# Allegro board ENCODER_ZPULSE_DIRECTION.brd
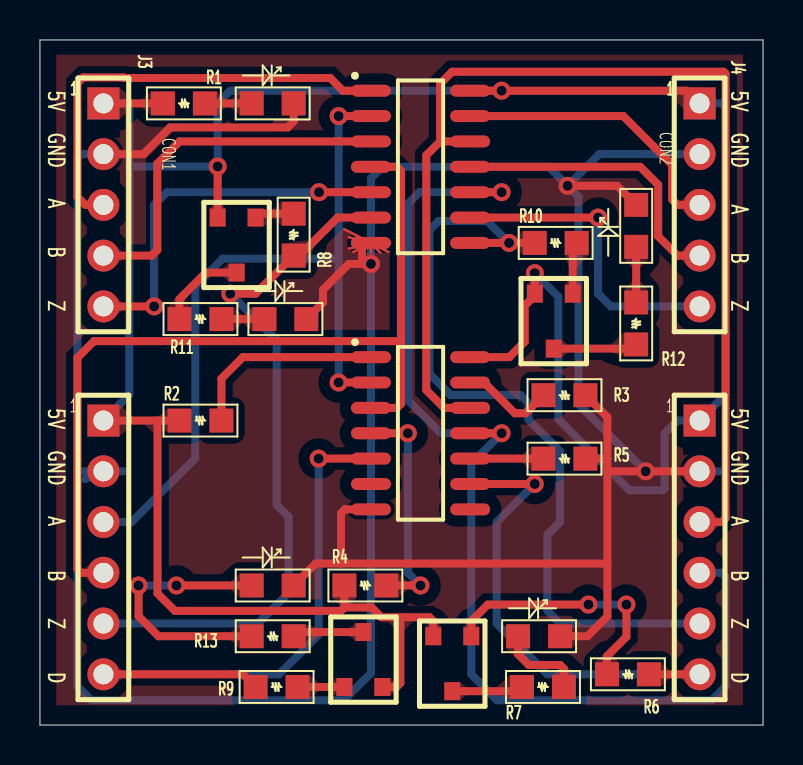
[diagram p0: board, top side]
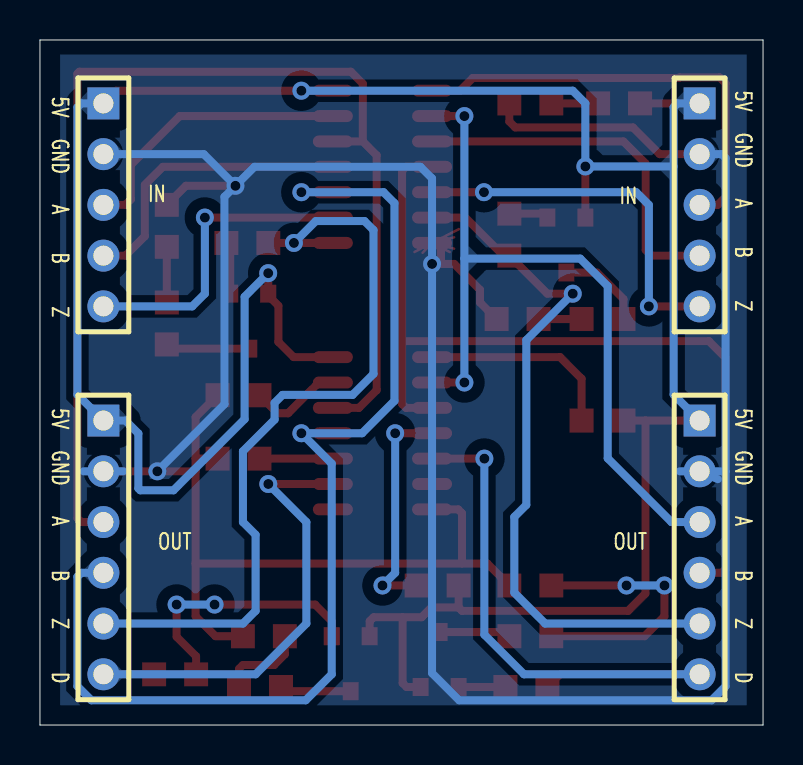
[diagram p1: board, bottom side, seen from below]

Outline 36.2 x 34.29 mm; copper layers: TOP, BOTTOM. Coordinates in mm from the lower left corner of the outline.
Outline path: 0,34.29 0,0 36.2,0 36.2,34.29 0,34.29

## Design rules (mm)
constraint set DEFAULT: min track width 0.4

## Placement (name value [footprint] x y rotation side)
CON1  ENCODER1 IN  [J1_5_254]  3.18 29.84 270 top
CON2  ENCODER2 IN  [J1_5_254]  33.02 29.84 270 top
D1  POWER LED  [LED_SMD_0805]  12.7 31.12 180 top
D3  Z1 LED  [LED_SMD_0805]  13.34 20.32 180 top
D4  Z2 LED  [LED_SMD_0805]  29.84 26.03 270 top
D5  DIR1 LED  [LED_SMD_0805]  12.7 6.98 180 top
J1  ENCODER1 OUT  [J1_6_254]  3.18 13.97 270 top
J2  ENCODER2 OUT  [J1_6_254]  33.02 13.97 270 top
Q1  2SA1015  [SOT23]  21.59 4.45 0 top
Q2  2SA1015  [SOT23]  10.79 25.4 0 top
Q3  2SA1015  [SOT23]  15.24 1.91 180 top
Q4  2SA1015  [SOT23]  26.67 21.59 0 top
Q*  DIR2 LED  [LED_SMD_0805]  26.04 4.45 180 top
R1  10K  [RES_SMD_0805]  8.26 31.12 180 top
R2  10K  [RES_SMD_0805]  6.99 15.24 0 top
R3  10K  [RES_SMD_0805]  27.3 16.51 180 top
R4  10K  [RES_SMD_0805]  15.24 6.98 0 top
R5  10K  [RES_SMD_0805]  27.3 13.34 180 top
R6  4.7K  [RES_SMD_0805]  30.48 2.54 180 top
R7  470R  [RES_SMD_0805]  24.13 1.91 0 top
R8  4.7K  [RES_SMD_0805]  12.7 23.49 90 top
R9  4.7K  [RES_SMD_0805]  10.79 1.91 0 top
R10  4.7K  [RES_SMD_0805]  24.77 24.13 0 top
R11  470R  [RES_SMD_0805]  6.99 20.32 0 top
R12  470R  [RES_SMD_0805]  29.84 19.05 90 top
R13  470R  [RES_SMD_0805]  12.7 4.45 180 top
U1  74HC14P  [SOIC14]  19.05 27.94 0 top
U2  74hc74_smd  [SOIC14]  19.05 14.61 0 top

## Library data of the parts
CON1 CON2 = CON5
D1 D3-D5 Q* = LED
J1 J2 = CON6
Q1-Q4 = PNP BEC
R1-R13 = R
U1 = 74HC14P_3
U2 = 74hc74_smd

## Footprints (pads in the part's own frame, mm; a bottom-side part is the same pattern mirrored in y, then rotated)
J1_5_254
  rect 1.6x1.6 hole 1: 1(-1.27,0)
  round 1.6 hole 1: 2(1.27,0) 3(3.81,0) 4(6.35,0) 5(8.89,0)
J1_6_254
  rect 1.6x1.6 hole 1: 1(-1.27,0)
  round 1.6 hole 1: 2(1.27,0) 3(3.81,0) 4(6.35,0) 5(8.89,0) 6(11.43,0)
LED_SMD_0805
  rect 1.2x1.2 smd: 1(0,0) 2(2.1,0)
RES_SMD_0805
  rect 1.2x1.2 smd: 1(0,0) 2(2.1,0)
SOIC14
  oval 2x0.6 smd: 1(-2.482,3.81) 2(-2.482,2.54) 3(-2.482,1.27) 4(-2.482,0) 5(-2.482,-1.27) 6(-2.482,-2.54) 7(-2.482,-3.81) 8(2.482,-3.81) 9(2.482,-2.54) 10(2.482,-1.27) 11(2.482,0) 12(2.482,1.27) 13(2.482,2.54) 14(2.482,3.81)
SOT23
  rect 0.8x0.9 smd: 1(0,0) 2(-1.9,0) 3(-0.95,-2.75)

## Nets
5V: CON1.1 CON2.1 J1.1 J2.1 Q1.2(E) Q2.2(E) Q3.2(E) Q4.2(E) R1.2 R2.1 R4.1 U1.14 U2.14(VCC)
GND: CON1.2 CON2.2 D1.1(CATHODE) D3.1(CATHODE) D4.1(CATHODE) D5.1(CATHODE) J1.2 J2.2 Q*.1(CATHODE) R3.1 R5.1 U1.7 U2.7
A1_IN: CON1.3 U1.1
A1_OUT: J1.3 U1.2 U2.2
A2_IN: CON2.3 U1.13
A2_OUT: J2.3 U1.12(Y6) U2.12
B1_IN: CON1.4 U1.3
B1_OUT: J1.4 U1.4 U2.3
B2_IN: CON2.4 U1.11
B2_OUT: J2.4 U1.10 U2.11
DIR1: J1.6 R9.1 U2.5
DIR2: J2.6 R6.1 U2.9
Z1_IN: CON1.5 U1.5
Z1_OUT: J1.5 R8.1 U1.6
Z2_IN: CON2.5 U1.9
Z2_OUT: J2.5 R10.1 U1.8
N311348: R2.2 U2.1
N311366: R3.2 U2.13
N311406: R4.2 U2.4
N311420: R5.2 U2.10
N317560: Q3.1 R9.2
N3135090: D1.2 R1.1
N3136230: Q2.1 R8.2
N3136232: Q2.3 R11.1
N3137361: D3.2 R11.2
N3138791: Q4.1 R10.2
N3138972: Q4.3 R12.1
N3139191: D4.2 R12.2
N3144992: Q3.3 R13.1
N3145211: D5.2 R13.2
N3146761: Q1.1 R6.2
N3146942: Q1.3 R7.1
N3147161: Q*.2 R7.2

Pads without a net: U2 6 8

## Via types
v1: diameter 0.9, hole 0.5, TOP to BOTTOM, 23 vias

## Routing (per net, layer and track width the routed paths; a pad name or vN(x,y) marks a point on that pad's centre or on a via; arc(x,y) is an arc through that point)
5V: length 133.7
  TOP w0.4: J1.1 5.89,15.24 ; 5.89,15.24 R2.1 ; 5.89,15.24 5.89,6.59 6.76,5.71 15.07,5.71 15.24,5.89 ; Q2.2 v1(8.9,27.96) ; R4.1 15.24,5.89 ; 15.24,5.89 16.6,5.89 17.09,5.39 18.04,5.39 ; 18.04,5.39 18.04,2.1 17.84,1.91 Q3.2 ; 18.04,5.39 19.49,5.39 19.69,5.2 Q1.2 ; R1.2 CON1.1 ; v1(24.77,22.62) Q4.2 24.77,21.5 24.26,20.99 24.26,19.18 23.49,18.41 U2.14 ; CON2.1 32.39,31.75 v1(23.11,31.75) U1.14
  BOTTOM w0.4: CON2.1 34.12,31.12 34.32,30.92 34.32,16.54 J2.1 31.92,15.24 31.27,14.59 31.27,11.85 31.17,11.75 29.51,11.75 25.95,15.31 25.95,21.44 v1(24.77,22.62) ; 4.48,27.96 4.48,16.54 J1.1 ; 4.48,27.96 v1(8.9,27.96) 8.9,31.12 9.53,31.75 v1(23.11,31.75) ; 4.48,27.96 4.48,30.92 4.28,31.12 CON1.1
GND: length 176
  TOP w0.127: 15.47,23.85 U1.7 ; U1.7 17.04,23.64 ; U1.7 15.47,24.41 ; U1.7 17.45,23.67 ; U1.7 16.57,23.64 ; U1.7 15.23,24.82 ; U1.7 16.09,23.64 ; U1.7 15.68,23.67
  TOP w0.4: v1(16.57,23.08) 16.12,23.08 ; 16.12,23.08 16.12,23.88 16.37,24.13 U1.7 ; 16.12,23.08 15.46,23.08 14.17,21.79 14.17,21.15 D3.1 ; J2.2 v1(30.32,12.7) 28.41,12.7 ; 15.07,8.09 28.41,8.09 ; 15.07,8.09 13.8,8.09 D5.1 ; 15.07,8.09 15.07,10.6 15.26,10.8 U2.7 ; 28.41,8.09 28.41,12.7 ; 28.41,8.09 28.41,5.45 27.41,4.45 Q*.1 ; R5.1 28.41,13.34 ; 28.41,13.34 28.41,15.41 R3.1 ; 28.41,13.34 28.41,12.7 ; v1(26.41,26.99) 28.89,26.99 D4.1 ; CON1.2 5.18,28.58 6.51,29.91 12.4,29.91 12.7,30.21 D1.1
  BOTTOM w0.4: 1.88,12.7 1.88,1.94 2.57,1.24 15.21,1.24 16.57,2.6 v1(16.57,23.08) 16.57,27.36 17.14,27.94 25.46,27.94 v1(26.41,26.99) ; 1.88,12.7 J1.2 ; 1.88,12.7 1.88,28.38 2.07,28.58 CON1.2 ; v1(26.41,26.99) 27.99,28.58 CON2.2 ; v1(26.41,26.99) 26.96,26.44 26.96,16.06 v1(30.32,12.7) ; 2.27,12.31 J1.2 ; J1.2 4.17,12.7 ; 32.03,12.7 J2.2 34.01,12.7
A1_IN: length 22.2
  TOP w0.4: CON1.3 2.28,26.03 1.88,26.44 1.88,32.12 2.17,32.41 4.18,32.41 4.21,32.38 14.53,32.38 15.17,31.75 U1.1
A1_OUT: length 38.9
  TOP w0.4: U2.2 v1(14.95,17.15) ; U1.2 v1(14.95,30.48)
  BOTTOM w0.4: v1(14.95,30.48) 14.95,23.34 ; 14.95,23.34 9.15,23.34 7.78,21.97 7.78,13.35 4.58,10.16 J1.3 ; 14.95,23.34 v1(14.95,17.15)
A2_IN: length 14.3
  TOP w0.4: U1.13 29.2,30.48 31.65,28.03 31.65,26.31 31.92,26.03 CON2.3
A2_OUT: length 57.9
  TOP w0.4: J2.3 34.12,10.16 34.32,10.36 34.32,32.6 34.22,32.7 20.63,32.7 20.03,32.1 20.03,29.21 ; 20.03,29.21 U1.12 ; 20.03,29.21 19.34,28.52 19.34,16.76 20.23,15.88 U2.12
B1_IN: length 18.3
  TOP w0.4: CON1.4 5.59,23.49 5.88,23.78 5.88,28.1 6.99,29.21 U1.3
B1_OUT: length 43.3
  TOP w0.4: U1.4 17.87,27.94 18.07,27.74 18.07,19.22 ; 18.07,19.22 2.71,19.22 1.88,18.38 1.88,7.82 2.07,7.62 3.18,7.62 ; 18.07,19.22 18.07,16.07 17.87,15.88 U2.3
B2_IN: length 14.8
  TOP w0.4: CON2.4 31.92,23.49 30.95,24.47 30.95,27.04 30.05,27.94 U1.11
B2_OUT: length 56.4
  TOP w0.4: U2.11 v1(23.11,14.61) ; U1.10 v1(23.11,26.67)
  BOTTOM w0.4: v1(23.11,26.67) 19,26.67 18.45,26.12 18.45,16.22 20.07,14.61 v1(23.11,14.61) 21.59,13.09 21.59,2.54 22.89,1.24 33.62,1.24 34.32,1.94 34.32,7.42 34.12,7.62 33.02,7.62
DIR1: length 30.9
  TOP w0.4: J1.6 10.16,2.54 R9.1 ; v1(13.95,13.34) U2.5
  BOTTOM w0.4: v1(13.95,13.34) 13.95,4.52 11.96,2.54 J1.6
DIR2: length 24.8
  TOP w0.4: R6.1 J2.6 ; U2.9 v1(24.77,12.07)
  BOTTOM w0.4: J2.6 25.4,2.54 22.86,5.08 22.86,10.16 v1(24.77,12.07)
Z1_IN: length 18.7
  TOP w0.4: v1(13.97,26.67) U1.5 ; CON1.5 v1(5.71,20.95)
  BOTTOM w0.4: v1(5.71,20.95) 5.71,26.03 6.35,26.67 v1(13.97,26.67)
Z1_OUT: length 34.7
  TOP w0.4: U1.6 14.9,25.4 13,23.49 R8.1 10.79,21.59 v1(9.53,21.59)
  BOTTOM w0.4: v1(9.53,21.59) 11.85,19.27 11.85,11.02 12.45,10.42 12.45,6.62 10.91,5.08 J1.5
Z2_IN: length 15.6
  TOP w0.4: U1.9 v1(27.94,25.4)
  BOTTOM w0.4: v1(27.94,25.4) 27.94,21.59 28.58,20.95 CON2.5
Z2_OUT: length 39.8
  TOP w0.4: R10.1 v1(23.48,24.13) U1.8
  BOTTOM w0.4: v1(23.48,24.13) 22.39,25.23 19.95,25.23 19.5,24.77 19.5,17.58 20.55,16.52 24.05,16.52 24.45,16.12 24.45,15.29 26.04,13.7 26.04,10.16 25.4,9.52 25.4,5.72 26.04,5.08 J2.5
N311348: length 10
  TOP w0.4: R2.2 9.09,17.34 10.16,18.41 U2.1
N311366: length 4.7
  TOP w0.4: R3.2 24.3,15.61 23.77,15.61 22.23,17.15 U2.13
N311406: length 11.4
  TOP w0.4: U2.4 v1(18.41,14.61) ; v1(19.05,6.98) R4.2
  BOTTOM w0.4: v1(19.05,6.98) 18.41,7.62 v1(18.41,14.61)
N311420: length 3.7
  TOP w0.4: R5.2 U2.10
N317560: length 2.3
  TOP w0.4: Q3.1 R9.2
N3135090: length 2.3
  TOP w0.4: R1.1 D1.2
N3136230: length 2
  TOP w0.4: Q2.1 10.99,25.59 R8.2
N3136232: length 4.4
  TOP w0.4: R11.1 6.99,21.32 8.32,22.65 Q2.3
N3137361: length 2.1
  TOP w0.4: R11.2 11.23,20.32
N3138791: length 2.6
  TOP w0.4: 26.87,24.13 26.67,23.94 Q4.1
N3138972: length 4.2
  TOP w0.4: Q4.3 29.64,18.84 R12.1
N3139191: length 2.8
  TOP w0.4: R12.2 D4.2
N3144992: length 3.6
  TOP w0.4: Q3.3 12.91,4.66 R13.1
N3145211: length 13.3
  TOP w0.4: R13.2 5.94,4.45 4.94,5.45 v1(4.94,6.98) ; D5.2 v1(6.84,6.98)
  BOTTOM w0.4: v1(6.84,6.98) v1(4.94,6.98)
N3146761: length 12.8
  TOP w0.4: R6.2 28.38,3.44 29.36,4.42 v1(29.36,6.03) ; Q1.1 21.59,5.2 22.42,6.03 v1(27.45,6.03)
  BOTTOM w0.4: v1(27.45,6.03) v1(29.36,6.03)
N3146942: length 3.6
  TOP w0.4: R7.1 23.92,1.7 Q1.3
N3147161: length 4.4
  TOP w0.4: R7.2 26.23,2.81 26.03,3 24.47,3 23.94,3.54 Q*.2

## Copper pours and planes (outline as drawn; the poured copper is in the pictures)
GND on TOP: 0.75,0.93 0.75,33.62 35.25,33.62 35.25,0.93 19.8,0.93 19.8,1 19.79,1.02 19.75,1.13 19.74,1.25 19.74,2.14 19.74,2.19 19.75,2.31 19.38,2.31 19.38,3.49 19.29,3.49 18.94,3.64 18.79,4 18.79,4.44 18.75,4.49 18.68,4.48 18.54,4.34 18.54,1.89 18.49,1.84 18.48,1.82 18.43,1.63 18.33,1.46 17.86,1.07 17.82,1.04 17.86,0.93 ; 14 cut-outs
GND on BOTTOM: 0.75,33.62 0.75,0.93 35.25,0.93 35.25,33.62 ; 7 cut-outs

Small or netless copper shapes (teardrops, artwork), in the pictures only: 77 on TOP, 20 on BOTTOM

## Text on the board
Ref Des/Silkscreen Bottom: IN | OUT | 5V | GND | A | B | Z | D
Ref Des/Silkscreen Top: 5V | GND | A | B | Z | D
